# EAGLE board Brave Densor (EAGLE 9.7.0)

Size 372.97 x 126.19 mm. Coordinates in mm from the lower left corner, seen from the top.
Outline: 0,0 372.97,0 372.97,126.19 0,126.19 0,0
Copper layers (1*16): Top 0.035mm / dielectric 1.5mm / Bottom 0.035mm
Design rules "default": minimum track width 6mil, minimum drill 0.35mm, track to track 6mil, track to pad 6mil, pad to pad 6mil, via to via 6mil, smd to smd 6mil, copper to edge 40mil, drill to drill 6mil, minimum pad ring 10mil, minimum via ring 8mil, stop-mask expansion 4mil, vias tented up to drill 0mil, thermal gap 10mil

## Footprints (pad centres in the part's own frame; a part is rotated, then mirrored left to right if it is on the bottom)
MQ-XX-SOCKET = drill 1.27: 1 -6.223,6.223; 2 -8.788,0; 3 -6.223,-6.223; 4 6.223,-6.223; 5 8.788,0; 6 6.223,6.223
LU-5-R = drill 0.8: 1 -6.35,-3.81; 5 3.81,-3.81; 6 6.35,-3.81; 7 6.35,3.81; 8 3.81,3.81; 12 -6.35,3.81
1X02 = drill 1.016 long: 1 -1.27,0; 2 1.27,0
MOTOR = drill 1.118 pad 3.15 octagon: + 2.54,0; - -2.54,0
BATTERY-GENERIC = drill 1.118 pad 3.15 octagon: + 2.54,0; - -2.54,0
PIEZO = drill 1 pad 1.6: 1 -3.5,0; 2 3.5,0
28015 = drill 1.016 long: 1 -2.54,0; 2 0,0; 3 2.54,0
28027 = drill 1.016 long: 1 -2.54,0; 2 0,0; 3 2.54,0
GL5528 = drill 0.8 pad 1.4: 1 -1.702,0; 2 1.702,0
RESAD1016W63L850D250B = drill 0.83 pad 1.43: 1 -5.08,0; 2 5.08,0
SWITCH-SPDT-PTH-8.5X3.7MM = drill 1.016 pad 1.88: 1 -2.54,0; 2 0,0; 3 2.54,0
SG90 = drill 1.016 long: 1 -2.54,0; 2 0,0; 3 2.54,0
ARDUINO-UNO-R3-SHIELD = drill 1.016 pad 1.88: 3.3V 24.13,-2.54; 5V 24.13,0; A0 24.13,12.7; A1 24.13,15.24; A2 24.13,17.78; A3 24.13,20.32; A4 24.13,22.86; A5 24.13,25.4; AREF -24.13,-13.97; D2 -24.13,20.32; D3 -24.13,17.78; D4 -24.13,15.24; D5 -24.13,12.7; D6 -24.13,10.16; D7 -24.13,7.62; D8 -24.13,3.81; D9 -24.13,1.27; D10 -24.13,-1.27; D11 -24.13,-3.81; D12 -24.13,-6.35; D13 -24.13,-8.89; GND@0 24.13,2.54; GND@1 24.13,5.08; GND@2 -24.13,-11.43; IOREF 24.13,-7.62; NC 24.13,-10.16; RES 24.13,-5.08; RX -24.13,25.4; SCL -24.13,-19.05; SDA -24.13,-16.51; TX -24.13,22.86; VIN 24.13,7.62

## Placement (x,y rotation side)
GAS1  GAS-SENSORMQ-XX-SOCKET  [MQ-XX-SOCKET]  322.76,58.52 270 top
K1  RELAY-SPDT_LU-5-R  [LU-5-R]  197.8,75.12 180 top
K2  RELAY-SPDT_LU-5-R  [LU-5-R]  237.6,51.52 180 top
L1  LIGHTBULB  [1X02]  269.71,55.09 0 top
L2  LIGHTBULB  [1X02]  269.71,19.69 0 top
M1  MOTOR_HDR  [MOTOR]  198.63,92.41 0 top
P1  BATTERYGENERIC  [BATTERY-GENERIC]  255.98,117.93 180 top
PIEZO1  PIEZO  [PIEZO]  361.24,48.48 0 top
PING1  DISTANCE-SENSOR-3PIN  [28015]  137.98,26.42 180 top
PIR1  PIR-SENSOR_28027  [28027]  108.89,105.86 0 top
R1  PHOTOCELL_GL5528  [GL5528]  139.35,66.07 0 top
R2  1k  [RESAD1016W63L850D250B]  130.57,60.58 90 top
R3  5k  [RESAD1016W63L850D250B]  317.77,80.63 90 top
S1  TOGGLE  [SWITCH-SPDT-PTH-8.5X3.7MM]  227.99,95.7 0 top
SERVO1  SERVOSG90  [SG90]  207.41,7.06 90 top
U1  ARDUINO-UNO-R3-SHIELD  [ARDUINO-UNO-R3-SHIELD]  29.84,36.56 180 top

## Library data of the parts
GAS1 K1 K2 L1 L2 M1 P1 PIEZO1 PING1 PIR1 R1-R3 S1 SERVO1 U1 = Tinkercad

## Nets
L2_1: K2.12 L2.1
L2_2: L1.2 L2.2
M1_+: M1.+ S1.1
M1_-: K1.6 M1.-
P1+: K2.6 P1.+ S1.2
P1-: K1.12 L1.1 P1.-
U1_5V: GAS1.4 GAS1.5 GAS1.6 PING1.2 PIR1.2 R2.1 SERVO1.2 U1.5V
U1_A0: R1.1 R2.2 U1.A0
U1_A1: GAS1.1 GAS1.3 R3.1 U1.A1
U1_D6: PING1.3 U1.D6
U1_D7: SERVO1.3 U1.D7
U1_D8: PIEZO1.1 U1.D8
U1_D9: PIR1.1 U1.D9
U1_D10: K1.8 U1.D10
U1_D13: K2.5 U1.D13
U1_GND: GAS1.2 K1.5 K2.8 PIEZO1.2 PING1.1 PIR1.3 R1.2 R3.2 SERVO1.1 U1.GND@0 U1.GND@1 U1.GND@2

## Tracks (layer width: path | path; a pad name or v marks a point on that pad's centre or on a via)
L2_1  (1 unrouted)
L2_2  (1 unrouted)
M1_+  (1 unrouted)
M1_-  (1 unrouted)
P1+  (2 unrouted)
P1-  (2 unrouted)
U1_5V  (7 unrouted)
U1_A0  (2 unrouted)
U1_A1  (3 unrouted)
U1_D6  (1 unrouted)
U1_D7  (1 unrouted)
U1_D8  (1 unrouted)
U1_D9  (1 unrouted)
U1_D10  (1 unrouted)
U1_D13  (1 unrouted)
U1_GND  (11 unrouted)